# EAGLE board ambient_tag_v2 (EAGLE 7.6.0)
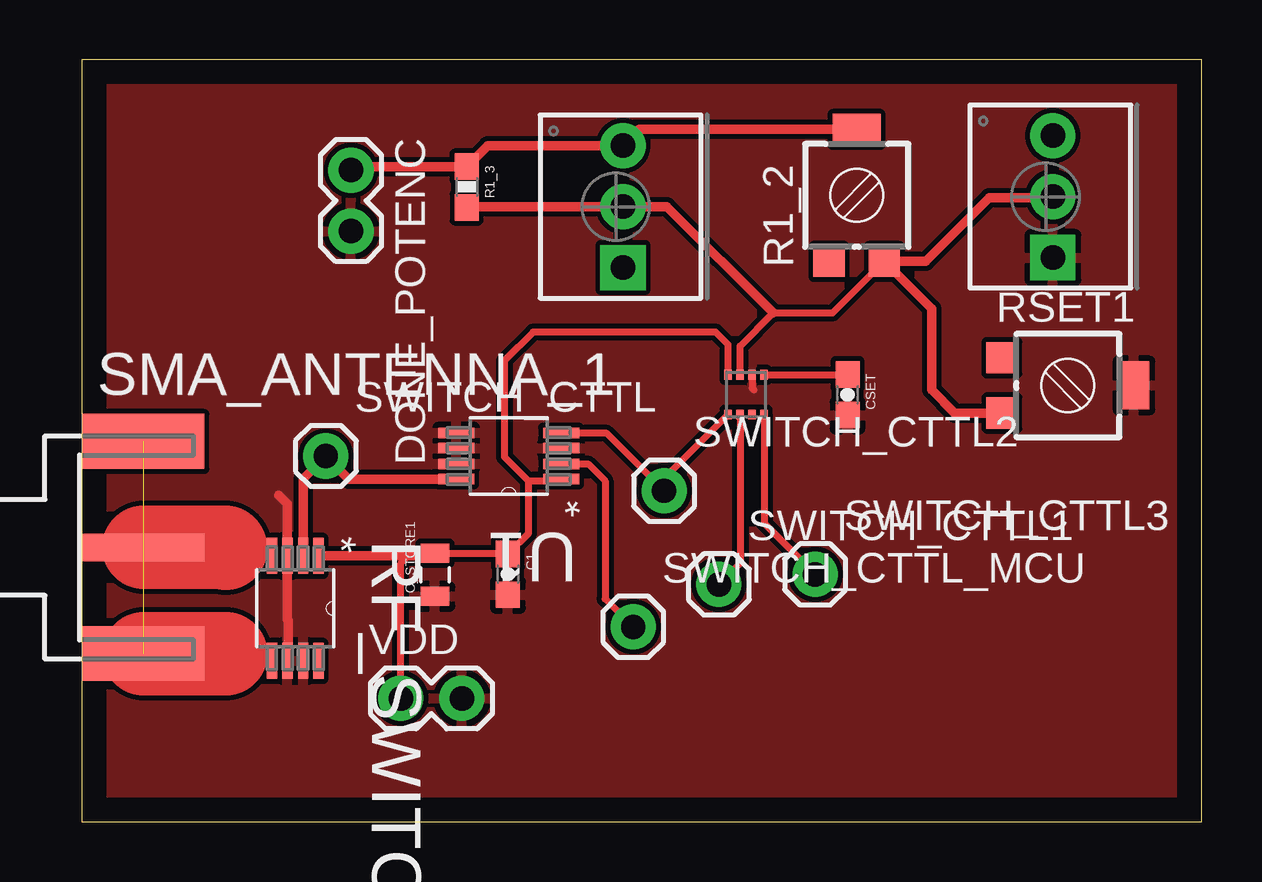
[diagram p0: board, top side]
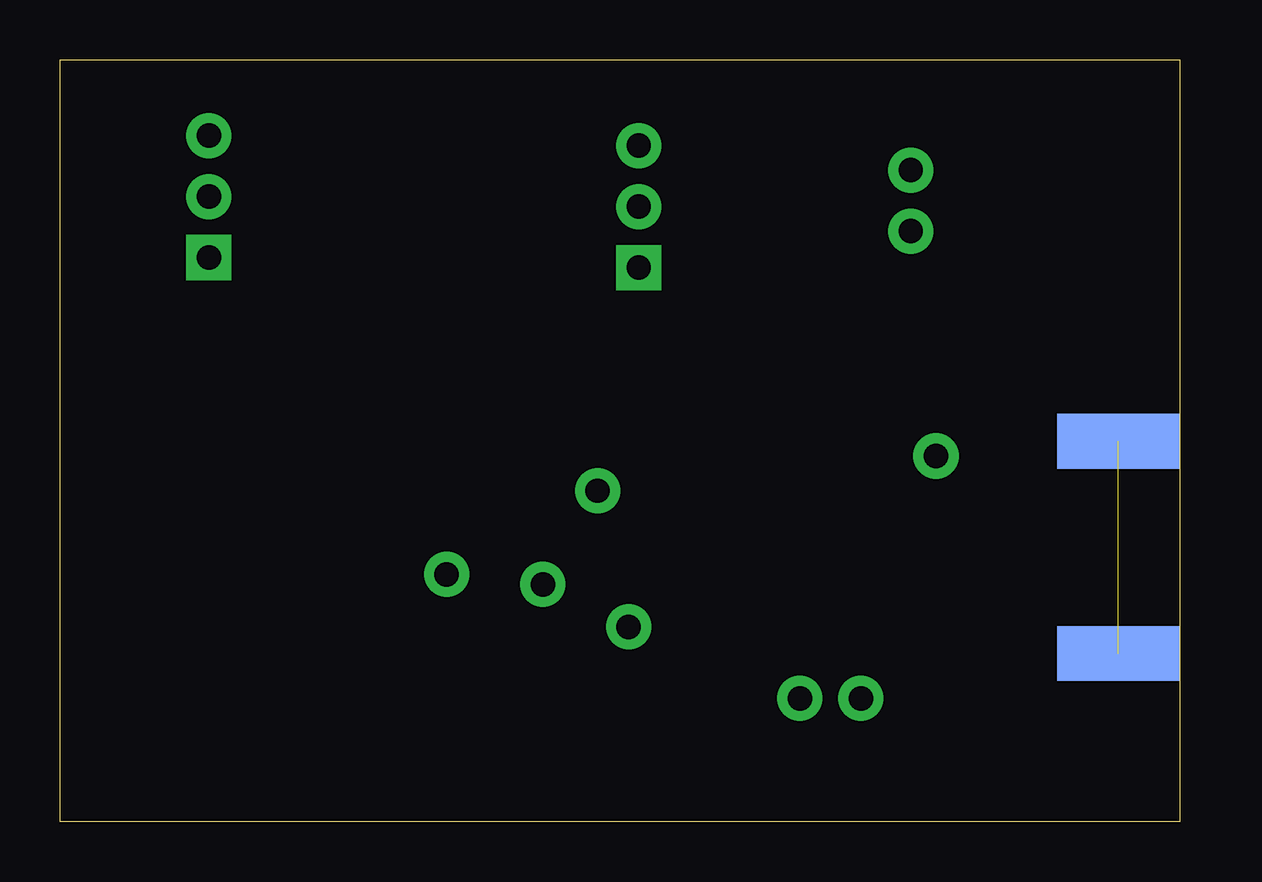
[diagram p1: board, bottom side, seen from below]

Size 46.66 x 31.74 mm. Coordinates in mm from the lower left corner, seen from the top.
Outline: 0,0 46.66,0 46.66,31.74 0,31.74 0,0
Copper layers (1*16): Top 0.035mm / dielectric 1.5mm / Bottom 0.035mm
Design rules "default": minimum track width 10mil, minimum drill 24mil, track to track 8mil, track to pad 8mil, pad to pad 8mil, via to via 8mil, smd to smd 8mil, copper to edge 40mil, drill to drill 8mil, minimum pad ring 10mil, minimum via ring 8mil, stop-mask expansion 4mil, vias tented up to drill 0mil, thermal gap 10mil

## Footprints (pad centres in the part's own frame; a part is rotated, then mirrored left to right if it is on the bottom)
0603-CAP = smd 1.1 x 1: 1 -0.85,0; 2 0.85,0
0805 = smd 0.8 x 1.2: 1 -0.9,0; 2 0.9,0
1X02 = drill 1.016 pad 1.88: 1 0,0; 2 2.54,0
3362U-2 = drill 1.016 pad 1.88 square: 1 -2.54,-0.305 | drill 1.016 pad 1.88: 2 0,-0.305; 3 2.54,-0.305
RTRIM3314G = smd 1.3 x 1.3: 1 1.15,-2.75; 3 -1.15,-2.75 | smd 2 x 1.3: 2 0,2.75
0603-RES = smd 1.1 x 1: 1 -0.85,0; 2 0.85,0
SOP65P490X110-8N = smd 1.499 x 0.432: 1 -2.184,0.965; 2 -2.184,0.33; 3 -2.184,-0.33; 4 -2.184,-0.965; 5 2.184,-0.965; 6 2.184,-0.33; 7 2.184,0.33; 8 2.184,0.965
J502-ND-142-0701-881/886 = smd 5.08 x 1.143: 1 2.565,0 | smd 5.08 x 2.286: G@1 2.565,4.42; G@2 2.565,-4.42 | smd 5.08 x 2.286 bottom: G@3 2.565,4.42; G@4 2.565,-4.42
1X01 = drill 1.016 pad 1.88: 1 0,0
TDFN22-8 = smd 0.408 x 0.306: 1 -1.78,-0.7; 2 -1.78,-1.2; 4 -1.78,-2.2; 5 -0.13,-2.2; 6 -0.13,-1.7; 7 -0.13,-1.2; 8 -0.13,-0.7 | smd 0.407 x 0.306: 3 -1.78,-1.7

## Placement (x,y rotation side)
C1  0.1 uF  [0603-CAP]  17.75,10.31 270 top
C_STORE1  4.7uF  [0805]  14.71,10.29 90 top
CSET  8.5 pF  [0603-CAP]  31.9,17.79 270 top
DONE_POTENC  [1X02]  11.21,27.15 270 top
LOGO1  OSHW-LOGOL  [OSHW-LOGO-L]  -16.51,57.15 0 top  (outside the outline)
R1  TRIMPOT  [3362U-2]  40.15,26.05 90 top
R1_2  [RTRIM3314G]  32.28,26.1 0 top
R1_3  [0603-RES]  16.03,26.45 270 top
R2  TRIMPOT  [3362U-2]  22.24,25.63 90 top
RF_SWITCH  ADG919BRMZ  [SOP65P490X110-8N]  8.89,8.89 270 top
RSET1  [RTRIM3314G]  41.08,18.18 270 top
SMA_ANTENNA_1  SMA-142-0701-881/886  [J502-ND-142-0701-881/886]  0,11.43 0 top
SWITCH_CTTL  M01PTH  [1X01]  10.16,15.24 0 top
SWITCH_CTTL1  M01PTH  [1X01]  26.54,9.89 0 top
SWITCH_CTTL2  M01PTH  [1X01]  24.26,13.79 0 top
SWITCH_CTTL3  M01PTH  [1X01]  30.55,10.31 0 top
SWITCH_CTTL_MCU  M01PTH  [1X01]  22.97,8.12 0 top
U1  ADG902BRMZ  [SOP65P490X110-8N]  17.78,15.24 180 top
U$1  [TDFN22-8]  26.22,18.75 90 top
VDD  [1X02]  13.29,5.14 0 top

## Library data of the parts
C1 CSET = SparkFun-Capacitors
C_STORE1 = SparkFun-Capacitors; PROD_ID: CAP-11625
DONE_POTENC R1 R2 SWITCH_CTTL SWITCH_CTTL1-SWITCH_CTTL3 SWITCH_CTTL_MCU VDD = SparkFun
LOGO1 = SparkFun-Aesthetics
R1_2 RSET1 = rcl
R1_3 = SparkFun-Passives
RF_SWITCH = analog-devices-Phase-2; MPN: ADG919BRMZ; OC_FARNELL: 1346347; OC_NEWARK: 59K1711; PACKAGE: MSOP-8; SUPPLIER: Analog Devices
SMA_ANTENNA_1 = con-coax; MF: JOHNSON COMPONENTS; MPN: 142-0701-881; OC_FARNELL: 1608603; OC_NEWARK: 08B906
U1 = analog-devices-Phase-2; MPN: ADG902BRMZ; OC_FARNELL: 1346345; OC_NEWARK: 59K1691; PACKAGE: MSOP-8; SUPPLIER: Analog Devices
U$1 = ts3002TDFN22_8pin

## Nets
CTRL: SWITCH_CTTL3.1 U$1.4
GND: C1.2 C_STORE1.1 CSET.2 DONE_POTENC.2 R1.1 RF_SWITCH.3 RF_SWITCH.6 RF_SWITCH.7 RSET1.2 U1.3 U1.5 U1.6 U1.7 U$1.6 VDD.2
N$1: DONE_POTENC.1 R1_2.2 R1_3.1 R2.3
N$2: SWITCH_CTTL_MCU.1 U1.2
N$3: SWITCH_CTTL1.1 U$1.2
N$6: R1.2 R1_2.1 R1_3.2 R2.2 RSET1.1 U$1.7
N$8: CSET.1 U$1.5
RF1: RF_SWITCH.8
RF2: RF_SWITCH.5 SMA_ANTENNA_1.G@1 SMA_ANTENNA_1.G@2 SMA_ANTENNA_1.G@3 SMA_ANTENNA_1.G@4
RFC: RF_SWITCH.4 SMA_ANTENNA_1.1
SWITCH_CTTL: RF_SWITCH.2 SWITCH_CTTL.1 U1.8
TIMER: SWITCH_CTTL2.1 U1.4 U$1.1
VDD_1.8V: C1.1 C_STORE1.2 RF_SWITCH.1 U1.1 U$1.8 VDD.1

## Tracks (layer width: path | path; a pad name or v marks a point on that pad's centre or on a via)
CTRL
  Top 0.3: U$1.4 28.42,12.44 SWITCH_CTTL3.1
GND
  Top 0.3: U$1.6 27.92,18.08 28,18
  Top 0.4: RF_SWITCH.6 8.6,6.75 8.6,8.4 8.56,8.44 RF_SWITCH.3 8.56,13.24 8.2,13.6
  pour Top: -2.54,81.28 -2.54,-2.54 104.14,-2.54 104.14,81.28
N$1
  Top 0.4: R1_2.2 23.23,28.85 R2.3 16.9,28.17 R1_3.1 11.36,27.3 DONE_POTENC.1
N$2
  Top 0.3: U1.2 21.09,14.91 21.8,14.2 21.8,9.29 SWITCH_CTTL_MCU.1
N$3
  Top 0.3: U$1.2 27.42,10.77 SWITCH_CTTL1.1
N$6
  Top 0.3: U$1.7 27.42,19.82 28.8,21.2 31.28,21.2 R1_2.1
  Top 0.4: R1.2 40.41,26 37.8,26 35.15,23.35 R1_2.1 35.4,21.38 35.4,18 36.37,17.03 RSET1.1 | 28.8,21.2 24.37,25.63 R2.2 16.06,25.63 R1_3.2
N$8
  Top 0.3: U$1.5 31.88,18.62 CSET.1
RF2  (3 unrouted)
  Top 0.3: RF_SWITCH.5 7.49,6.71 7.2,7
  Top 0.5: 6,7 7.2,7 7.63,7
  Top 3.48: SMA_ANTENNA_1.G@4 5.99,7.01 6,7
RFC
  Top 0.3: RF_SWITCH.4 7.53,11.07 7.2,11.4
  Top 0.5: 6,11.4 7.2,11.4 7.6,11.4
  Top 3.48: SMA_ANTENNA_1.1 5.97,11.43 6,11.4
SWITCH_CTTL
  Top 0.4: RF_SWITCH.2 9.22,14.3 SWITCH_CTTL.1 11.12,14.28 U1.8
TIMER
  Top 0.3: U$1.1 24.26,14.31 SWITCH_CTTL2.1 21.84,16.2 U1.4
VDD_1.8V
  Top 0.3: U$1.8 26.92,19.88 26.4,20.4 18.8,20.4 17.6,19.2 17.6,15.2 18.6,14.2 | 18.6,14.2 19.89,14.2 U1.1 | 18.6,14.2 18.6,12.01 C1.1 14.74,11.16 C_STORE1.2 | VDD.1 13.29,10.76 13.6,11.07
  Top 0.4: RF_SWITCH.1 13.6,11.07 14.59,11.07 C_STORE1.2